# Altium PCB PCB.PcbDoc
Units mm, origin at the board's own origin, x right, y up, seen from the top; angles counter-clockwise.
Board outline 194.82 x 157.1 mm, 2 copper layers (Top Layer, Bottom Layer); 36 components, 25 nets, 102 pads, 15 vias.
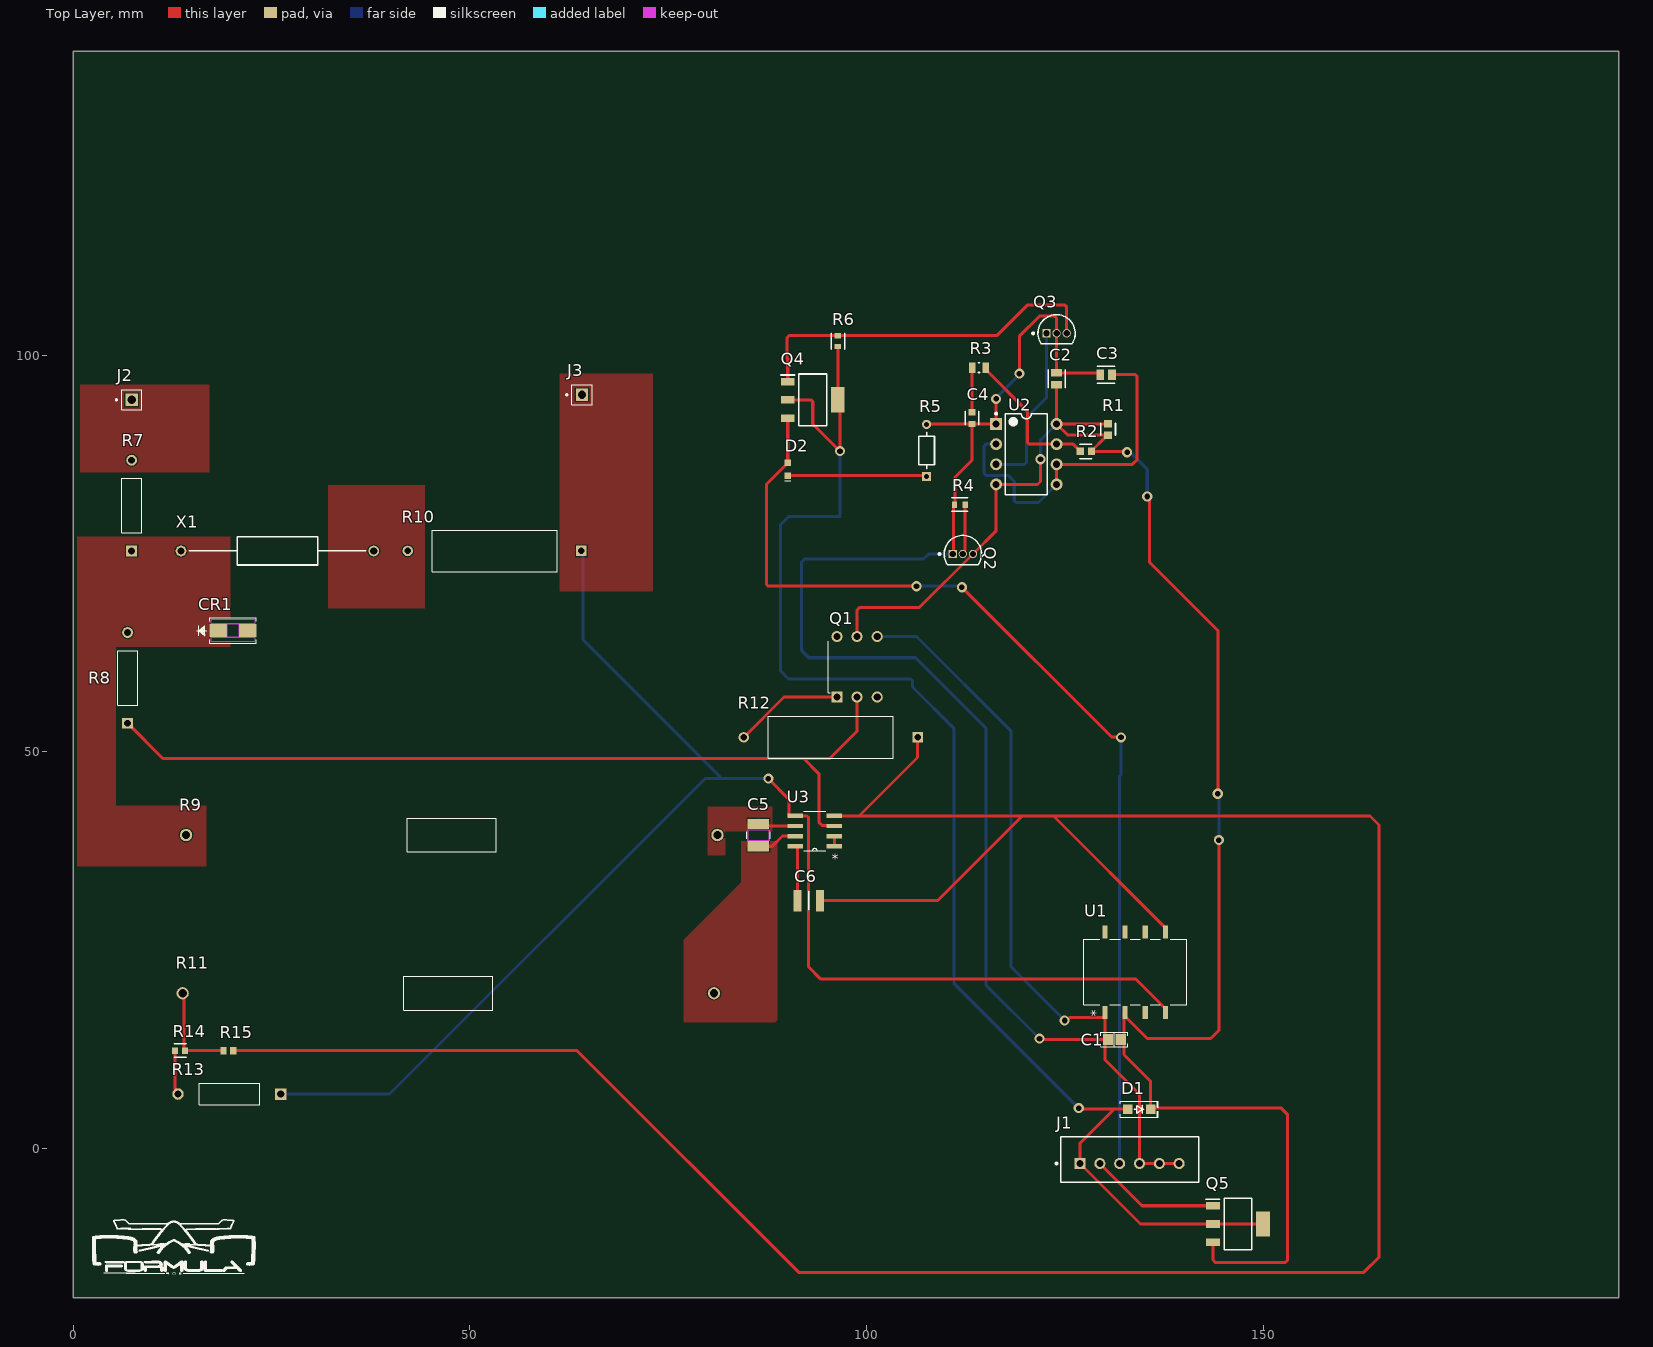
[diagram p0: Top Layer view]
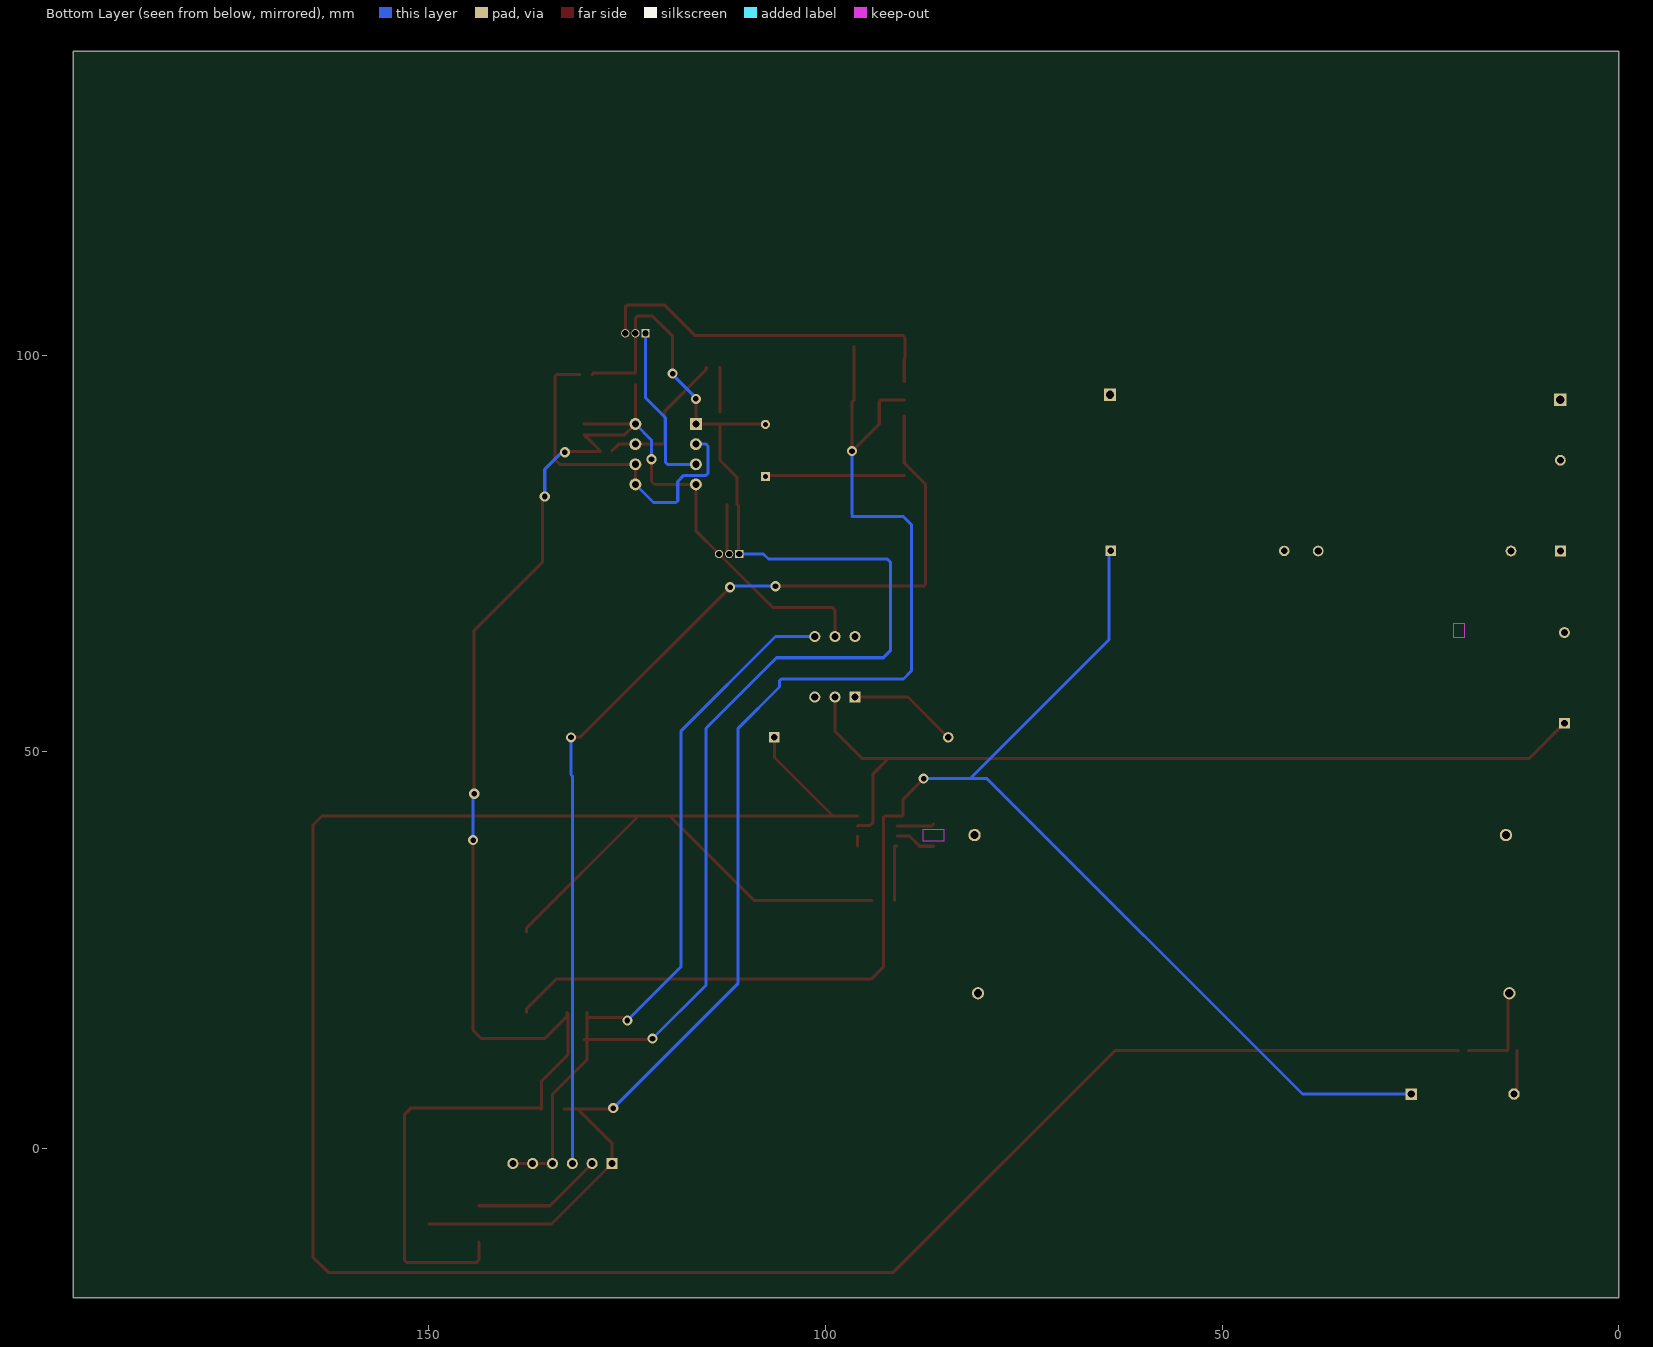
[diagram p1: Bottom Layer view, seen from below]
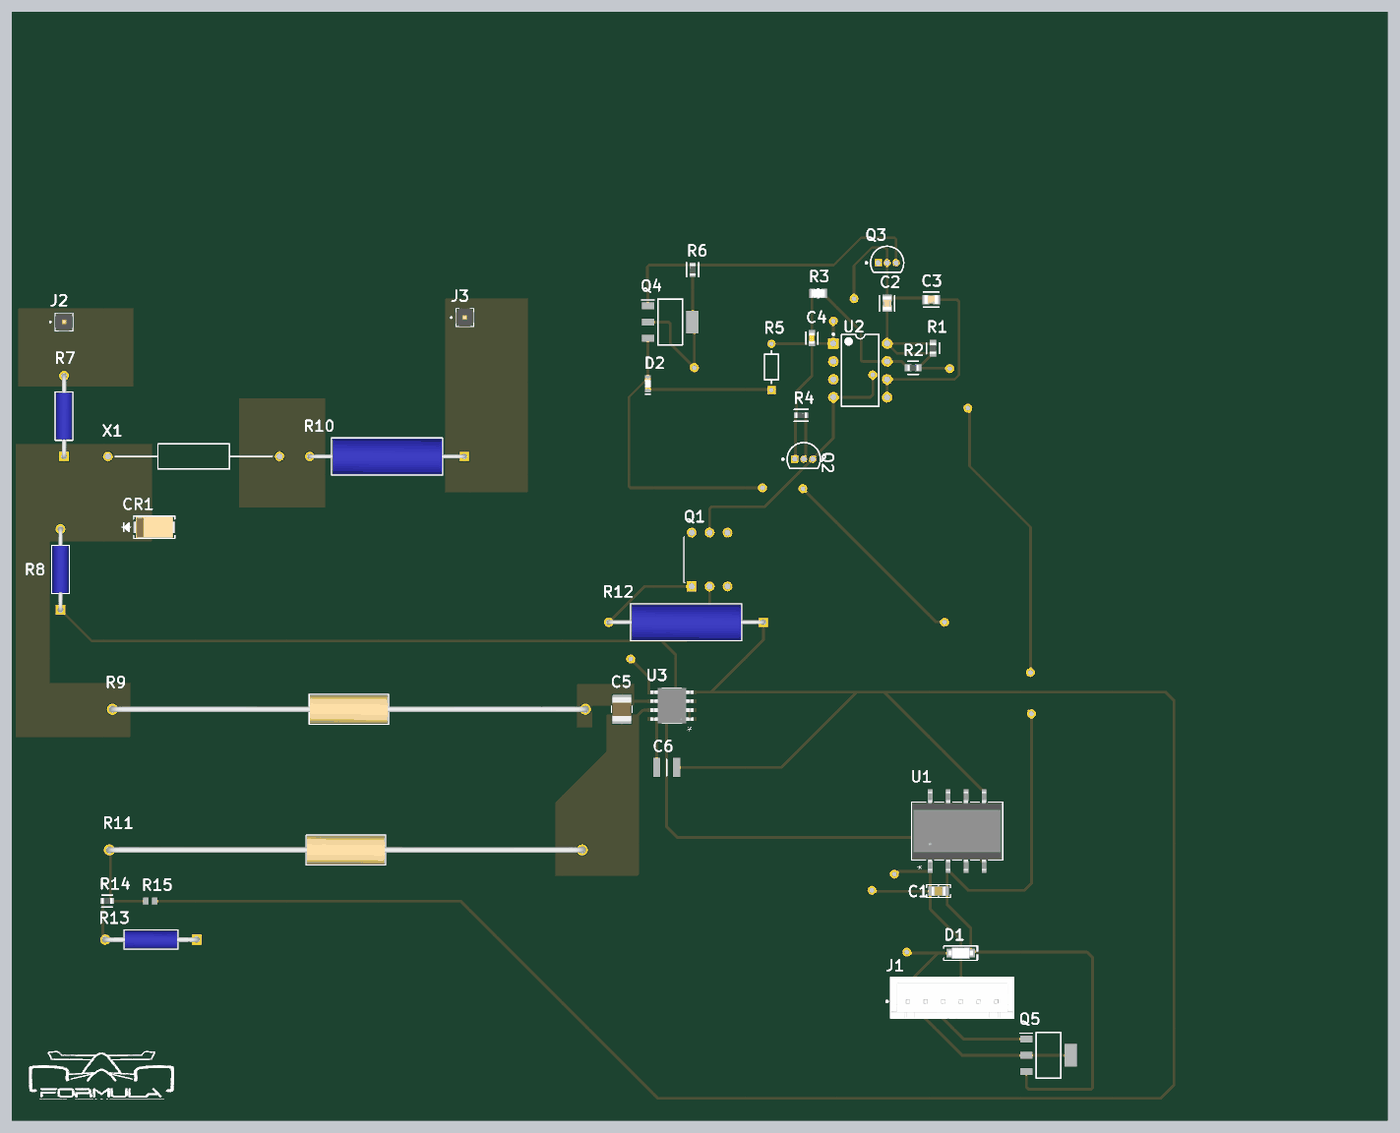
[diagram p2: 3D render of the assembled board from above, using the file's embedded part models]

## Layer stack, top to bottom
Top Solder: solder mask 0.0102, Solder Resist, Dk 3.5
Top Layer: signal copper 0.0356
Dielectric 1: dielectric 0.32, FR-4, Dk 4.8
Bottom Layer: signal copper 0.0356
Bottom Solder: solder mask 0.0102, Solder Resist, Dk 3.5

## Board outline
0,-18.796 194.818,-18.796 194.818,138.303 0,138.303

## Design rules (kind name [scope] priority, off if disabled: settings)
BoardOutlineClearance [All] p1: gap=0.2 ignorepadtopadclearanceinfootprint=FALSE
Clearance [All] p1: gap=0.127 ignorepadtopadclearanceinfootprint=FALSE except(0.25: Arc-Hole Track-Hole SMDPad-Hole THPad-Hole Via-Hole Fill-Hole Poly-Hole Region-Hole Text-Hole)
ComponentClearance [All] p1: gap=0.127 collisioncheckmode=3 verticalgap=0.127 showdistances=TRUE
DiffPairsRouting [All] p1: maxlimit=0.254 minlimit=0.127 mostfreqgap=0.127 toplayer_minwidth=0.127 toplayer_maxwidth=25.4 toplayer_prefwidth=0.127 bottomlayer_minwidth=0.127 bottomlayer_maxwidth=25.4 bottomlayer_prefwidth=0.127 maxuncoupledlength=12.7
Height [All] p1: minheight=0 maxheight=1816.048 prefheight=12.7
HoleSize [All] p1: absolutevalues=TRUE maxlimit=6.3 minlimit=0.3 maxpercent=80.000 minpercent=20.000
HoleToHoleClearance [All] p1: gap=0.25 allowstackedmicrovias=FALSE
MinimumAnnularRing [All] p1: minimumring=0.076
MinimumSolderMaskSliver [All] p1: minsoldermaskwidth=0
PlaneClearance [All] p1: clearance=0.127
PlaneConnect PlaneConnectPowerPads [InPadClass('PowerPads')] p1: planeconnectstyle=Direct reliefexpansion=0.508 reliefentries=4 reliefconductorwidth=0.254 reliefairgap=0.254
PlaneConnect [All] p2: pad.planeconnectstyle=Relief pad.reliefexpansion=0.3 pad.reliefentries=4 pad.reliefconductorwidth=0.127 pad.reliefairgap=0.127 via.planeconnectstyle=Direct via.reliefexpansion=0.3 via.reliefentries=4 via.reliefconductorwidth=0.127 via.reliefairgap=0.127
PolygonConnect PolygonConnectPowerPads [All vs (InPadClass('PowerPads'))] p1: connectstyle=Direct reliefconductorwidth=0.254 reliefentries=4 polygonreliefangle="90 Angle" airgapwidth=0.254
PolygonConnect [All] p2: thpad.connectstyle=Relief thpad.reliefconductorwidth=0.127 thpad.reliefentries=4 thpad.polygonreliefangle="90 Angle" thpad.airgapwidth=0.127 smdpad.connectstyle=Relief smdpad.reliefconductorwidth=0.127 smdpad.reliefentries=4 smdpad.polygonreliefangle="90 Angle" smdpad.airgapwidth=0.127 via.connectstyle=Direct via.reliefconductorwidth=0.127 via.reliefentries=4 via.polygonreliefangle="90 Angle" via.airgapwidth=0.127
RoutingVias [All] p1: holewidth=0.3 width=0.6 viastyle="Through Hole" minholewidth=0.3 minwidth=0.6 maxholewidth=0.6 maxwidth=6.6
SilkToSilkClearance [All] p1: silktosilkclearance=0
SilkToSolderMaskClearance [IsPad] p1: minsilkscreentomaskgap=0.127 clearancetoexposedcopper=TRUE
SolderMaskExpansion [All] p1: expansion=0.075 istentingtop=FALSE
Width [All] p1: maxlimit=25.4 minlimit=0.127 preferedwidth=0.127 minimp=50.000000 maximp=50.000000 favimp=50.000000
20 further rules are at their usual default settings.

## Classes and differential pairs
component class TOP: Q1
component class POWER: C1 D1 J1 U1
component class "LOW VOLTAGE": C2 C3 C4 D2 K1 K2 Q2 Q3 Q4 Q5 R1 R2 R3 R4 R5 R6 U2
component class "HIGH VOLTAGE": C5 C6 CR1 J2 J3 R7 R8 R9 R10 R11 R12 R13 R14 R15 U3 X1

## Components (designator, comment, footprint, x,y, rotation, side; value= is the part's Value field where it differs from the comment)
C1 "1 µF" "CAP 0805_2012" 131.229,13.716 r180 top
C2 "C0805C104K1RAC7210" FP-C0805C-DN-MFG 123.952,97.016 r90 top value="0.10 μF"
C3 "C0805C104K1RAC7210" FP-C0805C-DN-MFG 130.187,97.536 r180 top value="0.10 μF"
C4 "CC0603KRX7R7BB105" FP-CC0603-DA-MFG 113.284,92.063 r270 top value="1 uF"
C5 "C1210C103JCGACAUTO" CAPC340270_140N_KEM 86.36,39.491 r90 top
C6 "C1210W104KCRACAUTO" CAPC3225X230N 92.713,31.242 r180 top
CR1 "SMAZ12-13-F" SMA_DIO 20.145,65.278 r0 top
D1 "1N4007FLTR" SOD123F 134.366,4.953 r0 top
D2 "150060RS75000" WL-SMCW_0603_150060xx75000 90.068,85.611 r90 top
J1 "B6B-XH-A(LF)(SN)" FP-B6B-XH-A_LF_SN-MFG 133.156,-1.38 r0 top
J2 "861400011YO2LF" AMPHENOL_861400011YO2LF 7.366,94.361 r0 top
J3 "861400011YO2LF" AMPHENOL_861400011YO2LF 64.135,94.996 r0 top
Q1 "DIP-OPTOISO-3.55KV-TRANS-W/BASE-6DIP(4N35)" DIP6-2.54-7.3X6.5MM 98.806,60.706 r0 top
Q2 "2N7000" ONSC-TO-92-3-29-11 112.141,74.93 r0 top
Q3 "2N7000" ONSC-TO-92-3-29-11 123.952,102.743 r0 top
Q4 "MCT06P10-TP" SOT230P700X180-4N 93.218,94.361 r0 top
Q5 "MCT06P10-TP" SOT230P700X180-4N 146.812,-9.525 r0 top
R1 "CRCW060322K0FKEA" FP-CRCW0603-e3-IPC_B 130.429,90.631 r90 top
R2 "CRCW060322K0FKEA" FP-CRCW0603-e3-IPC_B 127.635,87.884 r0 top
R3 "CRCW0805220KFKEA" FP-CRCW0805-e3-IPC_C 114.173,98.425 r180 top
R4 "RC0603FR-0710KL" FP-RC0603-0_55-IPC_C 111.76,81.153 r0 top
R5 "CF18JT2K20" FP-CF18-MFG 107.569,87.989 r90 top value=2.2kΩ
R6 "RC0603FR-0710KL" FP-RC0603-0_55-IPC_C 96.393,101.769 r90 top
R7 "MOX200001004FE" RES_MOX-200_OHM 7.366,75.311 r90 top
R8 "MOX200001004FE" RES_MOX-200_OHM 6.858,53.594 r90 top
R9 "ASRM1JA100R" RES_ASRM1_STP 81.204,39.497 r180 top
R10 "FMP300FRF73-2K2" RES_FMP300_15P5X5_YAG 64.064,75.311 r180 top
R11 "ASRM1JA100R" RES_ASRM1_STP 80.772,19.558 r180 top
R12 "FMP300FRF73-2K2" RES_FMP300_15P5X5_YAG 106.426,51.816 r180 top
R13 "CMF55900R00FKR670" RES_CMF07_VIS 26.162,6.858 r180 top
R14 "CRCW060324K0FKEA" FP-CRCW0603-e3-IPC_C 13.462,12.319 r0 top
R15 "CRCW060375K0FKEA" RESC1609X50X30NL10T20 19.568,12.319 r0 top
U1 "TSM 1212S" TSM_SINGLE_TRP 133.858,22.225 r90 top
U2 "NE555P" P0008A 120.142,87.503 r0 top
U3 "LM311DR" D8 93.472,40.005 r180 top
X1 "CCF6049K9FKE36" RESAD2428W69L1016D353 37.889,75.311 r180 top

## Footprints (in the part's own frame and the unit in brackets; to place one, negate y for a bottom-side part, rotate by r counter-clockwise, add the part's x,y. Pads: shape width x height; smd on the part's side, far side on the other; paste and mask are expansions set on the pad)
AMPHENOL_861400011YO2LF [mm]
  rect 1.56x1.56 hole 1.04: 01(0,0)
  silkscreen extent -2.02,-1.27 1.27,1.27, body extent -1.27,-1.27 1.27,1.27, height 9.6
"CAP 0805_2012" [mm] "Chip Capacitor, 2-Leads, Body 2.00x1.20mm, IPC Medium Density"
  rect 1.3x1.4 smd: 1(-0.8,0) 2(0.8,0)
  silkscreen extent -1.7,-0.9 1.7,0.9, body extent -1,-0.64 1,0.64, height 1.26
CAPC3225X230N [mm]
  rect 1.02x2.72 smd: 1(-1.4,0) 2(1.4,0)
  silkscreen extent 0,-1.15 0,1.15
CAPC340270_140N_KEM [mm]
  rect 1.306x2.7 smd paste+0 mask+0: 1(-1.403,0) 2(1.403,0)
  Top Layer keep-out region: -0.699,-1.299 -0.699,1.299 0.699,1.299 0.699,-1.299
  Keep-Out Layer region: -0.699,-1.35 -0.699,1.35 0.699,1.35 0.699,-1.35
  silkscreen extent -0.44,-1.48 0.44,1.48, body extent -1.7,-1.35 1.7,1.35, height 1.4
D8 [mil]
  rect 78x22 smd paste-39 mask-39: 1(-97,75) 2(-97,25) 3(-97,-25) 4(-97,-75) 5(97,-75) 6(97,-25) 7(97,25) 8(97,75)
  silkscreen extent -54,-98 54,98, body extent -122,-99 122,99, height 69
DIP6-2.54-7.3X6.5MM [mm]
  rect 1.4x1.4 hole 0.9: 1(-2.54,-3.81)
  round 1.4 hole 0.9: 2(0,-3.81) 3(2.54,-3.81) 4(2.54,3.81) 5(0,3.81) 6(-2.54,3.81)
  silkscreen extent -3.65,-3.25 -3.4,3.25
FP-B6B-XH-A_LF_SN-MFG [mm]
  rect 1.4x1.4 hole 0.9 paste-1000 mask+0: 1(-6.25,-0.525)
  round 1.4 hole 0.9 paste-1000 mask+0: 2(-3.75,-0.525) 3(-1.25,-0.525) 4(1.25,-0.525) 5(3.75,-0.525) 6(6.25,-0.525)
  silkscreen extent -9.35,-2.88 8.7,2.88, body extent -8.8,-2.98 8.8,2.98, height 0.25
FP-C0805C-DN-MFG [mm]
  rect 0.95x1.35 smd paste+0 mask+0: 1(-0.75,0) 2(0.75,0)
  silkscreen extent -1.1,-1.07 1.1,1.07, body extent -1.4,-0.85 1.4,0.85, height 0.25
FP-CC0603-DA-MFG [mm]
  rect 0.8x0.9 smd paste+0 mask+0: 1(-0.75,0) 2(0.75,0)
  silkscreen extent -0.85,-0.85 0.85,0.85, body extent -1.35,-0.75 1.35,0.75, height 0.25
FP-CF18-MFG [mm]
  rect 1.15x1.15 hole 0.65 paste-1000 mask+0: 1(-3.28,0)
  round 1.15 hole 0.65 paste-1000 mask+0: 2(3.28,0)
  silkscreen extent -2.3,-1 2.3,1
FP-CRCW0603-e3-IPC_B [mm]
  rect 0.935x0.962 smd paste+0 mask+0: 1(-0.715,0) 2(0.715,0)
  silkscreen extent -0.75,-0.95 0.75,0.9, body extent -1.43,-0.73 1.43,0.73, height 0.25
FP-CRCW0603-e3-IPC_C [mm]
  rect 0.735x0.862 smd paste+0 mask+0: 1(-0.615,0) 2(0.615,0)
  silkscreen extent -0.75,-0.85 0.75,0.85, body extent -1.08,-0.58 1.08,0.58, height 0.25
FP-CRCW0805-e3-IPC_C [mil]
  rect 31.75x51.5 smd paste+0 mask+0: 1(-33.5,0) 2(33.5,0)
  silkscreen extent -3,-25 3,25, body extent -53,-31 53,31, height 10
FP-RC0603-0_55-IPC_C [mm]
  rect 0.659x0.812 smd paste+0 mask+0: 1(-0.677,0) 2(0.677,0)
  silkscreen extent -1.01,-0.85 1.01,0.85, body extent -1.11,-0.55 1.11,0.55, height 0.25
ONSC-TO-92-3-29-11 [mm] "TO, 3-Leads, Body Dia 4.7mm, Pitch 1.27mm"
  rect 1.05x1.05 hole 0.8: 1(-1.27,0)
  round 1.05 hole 0.8: 2(0,0) 3(1.27,0)
  silkscreen extent -3.07,-1.34 2.35,2.35, body extent -2.35,-1.33 2.36,2.36, height 7.87
P0008A [mm] "DIP, 8-Leads, Body 10.15x6.6mm, Pitch 2.54mm"
  rect 1.5x1.5 hole 0.9: 1(-3.81,3.81)
  round 1.5 hole 0.9: 2(-3.81,1.27) 3(-3.81,-1.27) 4(-3.81,-3.81) 5(3.81,-3.81) 6(3.81,-1.27) 7(3.81,1.27) 8(3.81,3.81)
  silkscreen extent -3.93,-5.1 2.65,5.23, body extent -3.95,-5.07 3.95,5.07, height 5.08
RES_ASRM1_STP [mil]
  round 61 / inner round 60 / far side round 61 hole 41 paste-30.5 mask+0: 1(0,0) 2(2637,0)
  silkscreen extent 1097,-83 1540,84, body extent -16,-78 2653,78, height 157
RES_CMF07_VIS [mil]
  rect 57x57 / inner round 60 / far side rect 57x57 hole 37 paste-28.5 mask+0: 1(0,0)
  round 57 / inner round 60 / far side round 57 hole 37 paste-28.5 mask+0: 2(510,0)
  silkscreen extent 105,-54 405,54, body extent -14,-49 524,49, height 98
RES_FMP300_15P5X5_YAG [mil]
  rect 52x52 / inner round 60 / far side rect 52x52 hole 32 paste-26 mask+0: 1(0,0)
  round 52 / inner round 60 / far side round 52 hole 32 paste-26 mask+0: 2(862.2,0)
  silkscreen extent 121,-103 741,104, body extent -11,-98 873,99, height 197
RES_MOX-200_OHM [mil]
  rect 54x54 / inner round 60 / far side rect 54x54 hole 34 paste-27 mask+0: 1(0,0)
  round 54 / inner round 60 / far side round 54 hole 34 paste-27 mask+0: 2(450,0)
  silkscreen extent 90,-50 360,50, body extent -12,-45 462,45, height 90
RESAD2428W69L1016D353 [mm]
  round 1.35 hole 0.9: 1(0,0) 2(24.3,0)
  silkscreen extent 1.02,-1.77 23.28,1.77
RESC1609X50X30NL10T20 [mm] "Chip Resistor, 2-Leads, Body 1.55x0.85mm, IPC Medium Density"
  rect 0.8x0.95 smd: 1(-0.625,0) 2(0.625,0)
  body extent -0.82,-0.48 0.82,0.48, height 0.5
SMA_DIO [mm]
  rect 2.18x1.63 smd paste+0 mask+0: 1(-1.857,0) 2(1.857,0)
  Top Layer keep-out region: -2.744,-1.409 -2.744,-0.866 2.744,-0.866 2.744,-1.409
  Top Layer keep-out region: -2.744,0.866 -2.744,1.409 2.744,1.409 2.744,0.866
  Top Layer keep-out region: -0.716,-0.866 -0.716,0.866 0.716,0.866 0.716,-0.866
  Keep-Out Layer region: -0.716,-0.866 -0.716,0.866 0.716,0.866 0.716,-0.866
  silkscreen extent -4.57,-1.59 2.92,1.59, body extent -2.8,-1.46 2.8,1.46, height 2.35
SOD123F [mm] "SODFL, 2-Leads, Body 1.60x3.50mm, IPC Medium Density"
  rect 1.2x1.2 smd: 1(-1.43,0) 2(1.43,0)
  silkscreen extent -2.41,-1.02 2.41,1.02, body extent -1.75,-0.8 1.75,0.8, height 1.1
SOT230P700X180-4N [mm]
  rect 1.75x0.95 smd: 1(-3.15,2.3) 2(-3.15,0) 3(-3.15,-2.3)
  rect 1.75x3.2 smd: 4(3.15,0)
  silkscreen extent -4.03,-3.25 1.75,3.25
TSM_SINGLE_TRP [mil]
  rect 65x26 smd paste+0 mask+0: 1(-200,150) 2(-200,50) 3(-200,-50) 4(-200,-150) 5(200,-150) 6(200,-50) 7(200,50) 8(200,150)
  silkscreen extent -163,-255 163,255, body extent -219,-250 219,250, height 278
WL-SMCW_0603_150060xx75000 [mm] "SMD Mono-color Chip LED, body 1.6x0.8mm"
  rect 0.8x0.8 smd: 1(-0.8,0) 2(0.8,0)
  silkscreen extent -1.55,-0.4 -1.4,0.4, body extent -0.8,-0.4 0.8,0.4, height 0.7

## Part data
C1: library part GCJ21BR71H105KA01L, "CAP CER 1UF 50V X7R 0805", Device Package="0805 (2012 Metric)", Manufacturer="Murata Electronics", Operating Temperature="-55°C ~ 125°C", Ratings=AEC-Q200, Supplier Part Number 1=490-10667-1-ND, Temperature Coefficient=X7R, Tolerance=±10%, Voltage - Rated=50V, Applications="Automotive, Boardflex Sensitive", Capacitance="1 µF", ComponentLink1Description=Datasheet, ComponentLink1URL=https://www.murata.com/~/media/webrenewal/support/library/catalog/products/capacitor/mlcc/c03e.ashx?la=en-us, ComponentLink2Description="DigiKey Link", ComponentLink2URL=https://www.digikey.com/en/products/detail/murata-electronics/GCJ21BR71H105KA01L/4903512, Features="Soft Termination", LastUpdated="2023-12-23 8:15:46 PM", Lifecycle Status=Active, Minimum Order=1, Mounting Type="Surface Mount, MLCC", Package / Case="0805 (2012 Metric)", Packaging=TapeAndReel, Part Number=GCJ21BR71H105KA01L, Part Status=Active, partid=2709, Price=0.05, Series=GCJ, Size / Dimension="0.079\" L x 0.049\" W (2.00mm x 1.25mm)", Supplier 1=DigiKey, Thickness (Max)="0.057\" (1.45mm)"
C2 C3: library part CMP-03020-008988-2, "C0805 0.10 μF X7R 30ppm/°C 10.00% 100 V", Capacitance="0.10 μF", Manufacturer=KEMET, Package=C0805C-DN, Temperature="-55°C to +125°C", Temperature Characteristic=X7R, Temperature Coefficient=30ppm/°C, Temperature Range High=+125°C, Temperature Range Low=-55°C, Tolerance=0.1, Voltage Rating="100 V", Automotive=No, Category=Cap, ComponentLink2Description=Datasheet, ComponentLink2URL=https://content.kemet.com/datasheets/KEM_C1003_C0G_SMD.pdf, Device Class L1="Passive Components", Device Class L2=Capacitors, Device Class L3="Ceramic Capacitors", Height=0.88mm, Ipc Land Pattern Name=CAPC200125X78, Lead Free=Yes, Manufacturer Part Number=C0805C104K1RAC7210, Material=Ceramic, Octopart=https://octopart.com/c0805c104k1rac7210-kemet-24791099, RoHS=TRUE
C4: library part CMP-03422-000924-1, "CAP CER 1UF 16V X7R 0603", Capacitance="1 uF", Manufacturer=YAGEO, Package=CC0603-DA, Temperature="-55°C to +125°C", Temperature Characteristic=X7R, Temperature Coefficient=15%, Temperature Range High=+125°C, Temperature Range Low=-55°C, Tolerance=0.1, Voltage="16 V", Automotive=No, Category=Cap, ComponentLink2Description=Datasheet, ComponentLink2URL=http://www.yageo.com/documents/recent/UPY-GPHC_X7R_6.3V-to-50V_18.pdf, Device Class L1="Passive Components", Device Class L2=Capacitors, Device Class L3="Ceramic Capacitors", Digikey Description="CAP CER 1UF 16V X7R 0603", Footprint Url=http://www.yageo.com/exep/pages/download/literatures/UPY-C_GEN_24.pdf, Height=0.9mm, Lead Free=Yes, Manufacturer Part Number=CC0603KRX7R7BB105, Material=Ceramic, Mouser Description="Multilayer Ceramic Capacitor, CC Series, 1 - F, - 10%, X7R, 16 V, 0603 [1608 Metric]", Octopart=https://octopart.com/cc0603krx7r7bb105-yageo-42271928, RoHS=TRUE, Voltage Rating="16 V"
C5: "No Description Available", Mfr_Name=Kemet, Copyright="Copyright (C) 2024 Ultra Librarian. All rights reserved.", Manufacturer_Part_Number=C1210C103JCGACAUTO, RefDes=RefDes, Type=DEV
C6: "ArcShield SMD Auto X7R HV, Ceramic, 0.1 uF, 10%, 500 VDC, 750 VDC, 125C, -55C, X7R, SMD, MLCC, ArcShield, High Voltage, Automotive Grade, 2.5 % , 1 GOhms, 105 mg, 1210, 3.3mm, 2.6mm, 2.1mm, 0.6mm, 2000, 78  Weeks, 80", Manufacturer_Name=KEMET, Mouser Part Number=80-C1210W104KCRAUTO, Datasheet Link=https://content.kemet.com/datasheets/KEM_C1034_X7R_HV_ARC_SMD.pdf, Geometry.Height=2.3mm, Manufacturer_Part_Number=C1210W104KCRACAUTO, Mouser Price/Stock=https://www.mouser.co.uk/ProductDetail/KEMET/C1210W104KCRACAUTO?qs=dO8Bi0p7p7Q4YyAQZJXbEw%3D%3D
CR1: "No Description Available", Mfr_Name="Diodes Inc", Copyright="Copyright (C) 2024 Ultra Librarian. All rights reserved.", Manufacturer_Part_Number=SMAZ12-13-F, RefDes=RefDes, Type=DEV
D1: "STANDARD RECTIFIER 1000V SOD-123", Capacitance @ Vr, F="15pF @ 4V, 1MHz", Current - Average Rectified (Io)=1A, Current - Reverse Leakage @ Vr="5µA @ 1000V", Manufacturer="SMC Diode Solutions", Package / Case=SOD-123F, Supplier Device Package=SOD-123FL, Supplier Part Number 1=1655-1N4007FLCT-ND, Voltage - DC Reverse (Vr) (Max)=1000V, Voltage - Forward (Vf) (Max) @ If="1.1V @ 1A", ComponentLink1Description=Datasheet, ComponentLink1URL=http://www.smc-diodes.com/propdf/1N4001FL-1N4007FL%20N1646%20REV.A.pdf, ComponentLink2Description="DigiKey Link", ComponentLink2URL=http://digikey.com/product-detail/en/smc-diode-solutions/1N4007FLTR/1655-1N4007FLCT-ND/11657827, Diode Type=Standard, LastUpdated="2020-08-30 8:59:55 PM", Lifecycle Status=Active, Minimum Order=1, Mounting Type="Surface Mount", Packaging=TapeAndReel, Part Number=1N4007FLTR, partid=3314, Price=0.01, Speed="Standard Recovery >500ns, > 200mA (Io)", Supplier 1=DigiKey
D2: library part CMP-1426-00001-3, Case Code (Imperial)=0603, Case Code (Metric)=1608, Color=Red, Forward Current=100mA, Forward Voltage=2V, Max Junction Temperature (Tj)=95°C, Max Operating Temperature=85°C, Max Reverse Voltage (DC)=5V, Min Operating Temperature=-40°C, Power Dissipation=72mW, Test Current=20mA, Case/Package=0603, Dominant Wavelength=625nm, Height=700µm, Length=1.6mm, Lens Style="Clear, Rectangular", Luminous Intensity=250mcd, Mount="Surface Mount", NexarPartId=29717776, Packaging="Tape and Reel", Peak Wavelength=630nm, REACH SVHC=Unknown, Reverse Voltage=5V, RoHS=Compliant, Viewing Angle=140°, Wavelength=625nm, Width=800µm
J1: library part CMP-17439-000076-1, "CONN HEADER VERT 6POS 2.5MM"
J2 J3: "Board to Board connector, Unshrouded Header, Through Hole, Single Row, 1 Position, Vertical.", Package=None, Check_prices=https://www.snapeda.com/parts/861400011YO2LF/Amphenol/view-part/?ref=eda, Digi-Key_Part_Number=609-861400011YO2LF-ND, MF="AMPHENOL ICC / FCI", MP=861400011YO2LF, Purchase-URL=https://pricing.snapeda.com/search/part/861400011YO2LF/?ref=eda, SnapEDA_Link=https://www.snapeda.com/parts/861400011YO2LF/Amphenol/view-part/?ref=snap
Q1: "Optoisolator Transistor with Base Output 5000Vrms 1 Channel 6-DIP", Package="DIP-6 Texas Instruments", Availability=Good, Check_prices=https://www.snapeda.com/parts/4N35/Vishay%20Semiconductor%20Opto%20Division/view-part/579099/?ref=eda, MF=Vishay, MP=4N35, Price=None, Purchase-URL=https://pricing.snapeda.com/search/part/4N35/?ref=eda, SnapEDA_Link=https://www.snapeda.com/parts/4N35/Vishay%20Semiconductor%20Opto%20Division/view-part/579099/?ref=snap
Q2 Q3: library part CMP-1058-00936-1, "Small Signal MOSFET, 200 mA, 60 V, N-Channel, 3-Pin TO-92, Bulk Box", Manufacturer="On Semiconductor", Package Type=TO-92, Channel Polarity="N Channel", Ciss Typ (pF)=60, ComponentLink1Description="Manufacturer URL", ComponentLink1URL=http://www.onsemi.com/, ComponentLink2Description=Datasheet, ComponentLink2URL=http://www.onsemi.com/pub_link/Collateral/2N7000-D.PDF, ComponentLink3Description="Package Specification", ComponentLink3URL=http://www.onsemi.cn/pub_link/Collateral/2N6426-D.PDF, Configuration=Single, Coss Typ (pF)=25, Crss Typ (pF)=5, DatasheetVersion="Rev. 8", ID Max (A)=0.2, Mounting Technology="Through Hole", PackageDescription="3-Pin Transistor Outline, Body 4.825 x 3.685 mm, Pitch 1.27 mm", PackageReference=TO-92-3-29-11_AM_SL, PackageVersion="Rev. AM", Packing="Bulk Box", PartNumber=2N7000, PD Max (W)=0.35, V(BR)DSS Min (V)=60, VGS Max (V)=20, VGS(th) Max (V)=3
Q4 Q5: "P-CHANNEL MOSFET", Manufacturer_Name=MCC, Mouser Part Number=833-MCT06P10-TP, Arrow Part Number=MCT06P10-TP, Arrow Price/Stock=https://www.arrow.com/en/products/mct06p10-tp/micro-commercial-components, Datasheet Link=https://www.mccsemi.com/pdf/Products/MCT06P10(SOT-223).pdf, Geometry.Height=1.8mm, Manufacturer_Part_Number=MCT06P10-TP, Mouser Price/Stock=https://www.mouser.co.uk/ProductDetail/Micro-Commercial-Components-MCC/MCT06P10-TP?qs=u16ybLDytRb58JP1wVwnug%3D%3D
R1 R2: library part CMP-2000-03092-2, "RES Thick Film, 22kΩ, 1%, 0.1W, 100ppm/°C, 0603", Case Code (Imperial)=0603, Case Code (Metric)=1608, Max Operating Temperature=155°C, Max Power Dissipation=100mW, Min Operating Temperature=-55°C, Package Quantity=10, Resistance=22kR, Temperature Coefficient=100ppm/°C, Tolerance=1%, Voltage Rating=75V, Case/Package=0603, Composition="Thick Film", Contact Plating=Tin, Depth=0.85mm, Features="Automotive AEC-Q200", Height=0.45mm, Lead Free="Lead Free", Length=1.55mm, Military Standard=Not, Mount="Surface Mount", Number of Terminations=2, Packaging="Tape and Reel", Power Rating=100mW, Radiation Hardening=No, Termination=SMD/SMT, Voltage Rating (DC)=75V, Weight=7.1E-05oz, Width=0.85mm
R3: library part CMP-1013-00772-3, "RES Thick Film, 220kΩ, 1%, 0.125W, 100ppm/°C, 0805", Case Code (Imperial)=0805, Case Code (Metric)=2012, Max Operating Temperature=155°C, Max Power Dissipation=125mW, Min Operating Temperature=-55°C, Package Quantity=10, Resistance=220kR, Temperature Coefficient=100ppm/°C, Tolerance=1%, Voltage Rating=150V, Case/Package=0805, Composition="Thick Film", Contact Plating=Tin, Depth=1.25mm, Features="Automotive AEC-Q200", Height=0.45mm, Lead Free="Lead Free", Length=2mm, Military Standard=Not, Number of Terminations=2, Packaging="Tape and Reel", Power Rating=125mW, Radiation Hardening=No, Termination=SMD/SMT, Voltage Rating (DC)=150V, Weight=0.000194oz, Width=1.25mm
R4 R6: library part CMP-2100-03664-2, "RES 10K OHM 1% 1/10W 0603", Case Code (Imperial)=0603, Case Code (Metric)=1608, Max Operating Temperature=155°C, Max Power Dissipation=100mW, Min Operating Temperature=-55°C, Resistance=10kR, Resistance Tolerance=1%, Resistor Type="Thick Film", Temperature Coefficient=100ppm/°C, Voltage Rating=75V, Voltage Rating (DC)=50V, Case/Package=0603, Construction=Rectangular, Depth=0.8mm, Features="Moisture Resistant", Height=0.45mm, Lead Free="Lead Free", Lead Pitch=0.3mm, Length=1.6mm, Military Standard=Not, Number of Pins=2, Number of Terminations=2, Packaging="Tape and Reel", Power Rating=100mW, RoHS Compliant=Yes, Series=RC, Size Code=0603, Termination=SMD/SMT, Tolerance=1%, Weight=7.1E-05oz, Width=0.8mm
R5: library part CMP-26528-000001-1, "RES 2.2K OHM 1/8W 5% CF AXIAL", Manufacturer="Stackpole Electronics Inc", Package=CF18, Power Rating=0.125W, Resistance=2.2kΩ, Temperature="-55°C to +155°C", Temperature Coefficient=0/-400ppm/°C, Temperature Range High=+155°C, Temperature Range Low=-55°C, Tolerance=5%, Voltage Rating=250V, Automotive=No, Category=Res, ComponentLink2Description=Datasheet, ComponentLink2URL=https://www.seielect.com/catalog/sei-cf_cfm.pdf, Composition="Carbon Film", Device Class L1="Passive Components", Device Class L2=Resistors, Device Class L3="Through-Hole Resistors", Digikey Description="RES 2.2K OHM 1/8W 5% CF AXIAL", Height=2mm, Ipc Land Pattern Name=RESAD656W65L360D200, Lead Free=Yes, Manufacturer Part Number=CF18JT2K20, Octopart=https://octopart.com/cf18jt2k20-stackpole+electronics-19205714, RoHS=TRUE, Series=CF
R7 R8: "No Description Available", Mfr_Name=Ohmite, Copyright="Copyright (C) 2024 Ultra Librarian. All rights reserved.", Digi-Key_Part_Number_1=MOX200001004FE-ND, Manufacturer_Part_Number=MOX200001004FE, RefDes=RefDes, Type=DEV
R9 R11: "No Description Available", Mfr_Name="Stackpole International", Copyright="Copyright (C) 2024 Ultra Librarian. All rights reserved.", Manufacturer_Part_Number=ASRM1JA100R, RefDes=RefDes, Type=DEV
R10 R12: "No Description Available", Mfr_Name=Yageo, Copyright="Copyright (C) 2024 Ultra Librarian. All rights reserved.", Manufacturer_Part_Number=FMP300FRF73-2K2, RefDes=RefDes, Type=DEV
R13: "No Description Available", Mfr_Name=Vishay, Copyright="Copyright (C) 2024 Ultra Librarian. All rights reserved.", Manufacturer_Part_Number=CMF55900R00FKR670, RefDes=RefDes, Type=DEV
R14: library part CMP-1012-00664-3, "RES Thick Film, 24kΩ, 1%, 0.1W, 100ppm/°C, 0603", Case Code (Imperial)=0603, Case Code (Metric)=1608, Max Operating Temperature=155°C, Max Power Dissipation=100mW, Min Operating Temperature=-55°C, Package Quantity=10, Resistance=24kR, Temperature Coefficient=100ppm/°C, Tolerance=1%, Voltage Rating=75V, Case/Package=0603, Composition="Thick Film", Contact Plating=Tin, Depth=0.85mm, Features="Automotive AEC-Q200", Height=0.45mm, Lead Free="Lead Free", Length=1.55mm, Military Standard=Not, Mount="Surface Mount", Number of Terminations=2, Packaging="Tape and Reel", Power Rating=100mW, Radiation Hardening=No, Termination=SMD/SMT, Voltage Rating (DC)=75V, Weight=7.1E-05oz, Width=0.033inch, Working Voltage=75V
R15: library part CMP-2000-03571-1, Manufacturer="Vishay Dale", Part Number=CRCW060375K0FKEA
U1: "No Description Available", Mfr_Name="Traco Power", Copyright="Copyright (C) 2024 Ultra Librarian. All rights reserved.", Manufacturer_Part_Number="TSM 1212S", RefDes=RefDes, Type=DEV
U2: library part CMP-2000-04954-1, "Precision Timer, 4.5 to 16 V, 0 to 70 degC, 8-Pin DIP, Pb-Free, Tube", Manufacturer=TexasInstruments, Maximum High Level Output Current=-200mA, Maximum Low Level Output Current=200mA, Operating Supply Voltage=5, Package=8PDIP, Package Description="8-Pin Double In-line Package, Body 9.59 x 6.35 mm, Pitch 2.54 mm", Package Reference=P8, Category=Timer, Datasheet URL=http://www.ti.com/general/docs/lit/getliterature.tsp?genericPartNumber=NE555&fileType=pdf, Datasheet Version="Rev. I, 09/2014", Manufacturer URL=http://www.ti.com/, Number of Internal Timers=1, Package URL=http://www.ti.com/lit/ml/mpdi001b/mpdi001b.pdf, Packaging=Rail/Tube, Rad Hard=No, Type=Standard
U3: "No Description Available", Mfr_Name="Texas Instruments", Copyright="Copyright (C) 2024 Ultra Librarian. All rights reserved.", Manufacturer_Part_Number=LM311DR, RefDes=RefDes, Type=DEV
X1: "Metal Film Resistors - Through Hole 1/2watt 49.9Kohms 1% Rated to 1watt", Manufacturer_Name=Vishay, Arrow Part Number=CCF6049K9FKE36, Arrow Price/Stock=https://www.arrow.com/en/products/ccf6049k9fke36/vishay?region=nac, Datasheet Link=https://www.vishay.com/doc?31068, Manufacturer_Part_Number=CCF6049K9FKE36

## Via types
v1: diameter 1.27, hole 0.711, Top Layer to Bottom Layer, 15 vias

## Nets (pads, with @x,y where several pads share a name; then routed paths per layer and width w, separated by ;. In a path a pad name is that pad's centre, name@x,y a point inside that pad or via, vN(x,y) a via of type N, cw(c..) or ccw(c..) an arc to the next point about the centre after c; other vN are vias at no path point)
12V: C6.1 R12.1 R15.2 U1.5 U3.4 | length 343.7
  Top Layer w0.381: R15.2 63.5,12.319 91.44,-15.621 162.687,-15.621 164.592,-13.716 164.592,40.767 163.449,41.91 123.558,41.91 ; C6.1 108.966,31.242 119.634,41.91 ; U3.4 99.06,41.91 ; R12.1 106.426,49.276 99.06,41.91 ; U1.5 137.668,27.8 123.558,41.91 ; 99.06,41.91 119.634,41.91 ; 119.634,41.91 123.558,41.91
cont: C3.1 U2.2 U2.5 U2.6 | length 44.8
  Top Layer w0.381: U2.5 U2.6 133.508,86.233 134.112,86.837 134.112,97.313 133.889,97.536 C3.1
  Bottom Layer w0.381: U2.2 115.031,88.773 114.808,88.55 114.808,85.09 115.062,84.836 117.856,84.836 118.618,84.074 118.618,81.63 118.841,81.407 121.666,81.407 U2.5
disch: R2.1 R3.1 U2.7 | length 18.7
  Top Layer w0.381: R3.1 115.024,98.174 120.269,92.929 120.269,88.996 120.492,88.773 U2.7 126.044,88.773 126.92,87.898 R2.1
GND: J3.01 R10.1 R13.1 U1.4 U3.5 | length 188.7
  Top Layer w0.381: v1(87.63,46.609) 90.208,44.031 90.208,41.999 90.297,41.91 U3.5 92.487,41.91 92.71,41.687 92.71,22.86 94.234,21.336 133.972,21.336 137.668,17.64 U1.4
  Bottom Layer w0.381: R13.1 39.878,6.858 79.629,46.609 81.788,46.609 ; R10.1 64.262,75.113 64.262,64.135 81.788,46.609 ; v1(87.63,46.609) 81.788,46.609
negativeRegulatorIn: C1.2 C2.2 C3.2 C4.2 J1.4 J1.5 J1.6 Q1.4 Q2.1 Q3.2 R4.1 R5.2 U1.1 U2.1 | length 257.3
  Top Layer w0.381: R5.2 107.591,91.291 113.262,91.291 C4.2 ; Q2.1 110.977,75.036 110.977,81.047 R4.1 111.125,81.195 111.125,84.582 113.284,86.741 C4.2 ; v1@116.205,94.361 116.332,94.234 U2.1 C4.2 ; v1(119.253,97.663) 119.253,102.362 121.793,104.902 123.729,104.902 123.952,104.679 Q3.2 C2.2 129.207,97.766 C3.2 ; v1(121.793,13.843) 121.92,13.716 C1.2@130.048,13.716 ; v1(124.968,16.129) 125.209,16.129 125.59,16.51 129.908,16.51 U1.1@130.048,16.65 ; U1.1 U1.1@130.048,16.65 ; C1.2 C1.2@130.048,13.716 ; J1.6 J1.5 J1.4 134.406,6.818 130.048,11.176 C1.2@130.048,13.716 ; C1.2@130.048,13.716 U1.1@130.048,16.65
  Bottom Layer w0.381: Q1.4 106.299,64.516 118.237,52.578 118.237,22.86 v1(124.968,16.129) ; Q2.1 107.823,74.93 107.188,74.295 92.202,74.295 91.821,73.914 91.821,62.738 92.71,61.849 106.172,61.849 115.062,52.959 115.062,20.574 v1(121.793,13.843) ; v1(116.332,94.488) 116.332,94.615 119.126,97.409 v1@119.253,97.409
NET_+: C5.2 R9.1 U3.6 | length 4.8
  Top Layer w0.381: C5.2 86.614,40.64 U3.6
NET_-: C5.1 R11.1 U3.7 | length 5.2
  Top Layer w0.381: C5.1 88.126,38.088 89.408,39.37 U3.7
NetC4_1: C4.1 R3.2 | length 5.6
  Top Layer w0.381: C4.1 113.303,92.832 113.303,98.406 R3.2
NetC6_2: C6.2 U3.8 | length 7.1
  Top Layer w0.381: U3.8 91.224,38.1 91.313,38.011 C6.2
NetCR1_1: CR1.1 R7.1 R8.2 R9.2 X1.2
NetD1_1: D1.1 J1.1 Q4.2 Q4.4 Q5.2 Q5.4 R6.1 | length 179.2
  Top Layer w0.381: Q4.2 92.995,94.361 93.218,94.138 93.218,91.313 v1(96.647,87.884) 96.647,94.132 Q4.4@96.393,94.386 ; Q4.4 Q4.4@96.393,94.386 ; R6.1 Q4.4@96.393,94.386 ; v1@127,5.207 127.254,4.953 131.191,4.953 ; D1.1 131.191,4.953 ; Q5.4 Q5.2 134.526,-9.525 J1.1 126.906,0.668 131.191,4.953
  Bottom Layer w0.381: v1(96.647,87.884) 96.647,86.233 96.678,86.202 96.678,79.883 ; 96.678,79.629 90.17,79.629 89.154,78.613 89.154,60.198 90.17,59.182 105.568,59.182 105.791,58.959 105.791,58.166 110.998,52.959 110.998,20.828 v1(126.746,5.08)
NetD2_1: D2.1 R5.1 | length 17.5
  Top Layer w0.381: D2.1 107.467,84.811 R5.1
NetD2_2: D2.2 J1.3 Q4.3 | length 128.4
  Top Layer w0.381: Q4.3@90.068,92.315 Q4.3 D2.2 87.376,83.719 87.376,71.089 87.599,70.866 v1@105.918,70.866 ; v1(112.014,70.739) 130.874,51.88 132.017,51.88 v1(132.08,51.816)
  Bottom Layer w0.381: v1(106.299,70.866) 111.887,70.866 v1(112.014,70.739) ; J1.3 131.906,46.943 132.08,47.117 v1(132.08,51.816)
NetJ1_2: J1.2 Q5.1 | length 16.5
  Top Layer w0.381: J1.2 134.726,-7.225 Q5.1
NetJ2_01: J2.01 R7.2
NetQ1_1: Q1.1 R12.2 | length 13.9
  Top Layer w0.381: R12.2 84.582,51.816 84.582,51.872 89.606,56.896 Q1.1
NetQ1_2: Q1.2 R8.1 U3.3 | length 110.5
  Top Layer w0.381: R8.1 11.303,49.149 92.075,49.149 ; U3.3 95.852,40.723 94.374,40.723 93.98,41.117 93.98,47.244 92.075,49.149 ; Q1.2 98.806,52.578 95.377,49.149 92.075,49.149
NetQ2_2: Q2.2 R4.2 | length 6.3
  Top Layer w0.381: Q2.2 112.141,75.111 112.437,75.407 R4.2
NetQ3_3: Q3.3 Q4.1 R6.2 | length 45.9
  Top Layer w0.381: Q4.1 90.068,99.545 89.99,99.623 89.99,102.222 90.214,102.445 R6.2 116.415,102.445 120.269,106.299 124.999,106.299 125.222,106.076 Q3.3
NetR10_2: R10.2 X1.1
NetR11_2: R11.2 R14.2 R15.1 | length 12.2
  Top Layer w0.381: R11.2 13.935,19.415 13.935,12.462 R14.2 R15.1
NetR13_2: R13.2 R14.1 | length 5.6
  Top Layer w0.381: R14.1 12.847,7.508 13.208,7.147 R13.2
NetU3_1: U3.1 U3.2 | length 1.3
  Top Layer w0.381: U3.1 U3.2
out: Q3.1 U2.3 | length 21.2
  Bottom Layer w0.381: U2.3 119.919,86.233 120.142,86.456 120.142,92.075 122.682,94.615 Q3.1
regulatorIn: C1.1 C2.1 D1.2 Q1.5 Q2.3 Q5.3 R1.1 R1.2 R2.2 U1.2 U2.4 U2.8 | length 223.7
  Top Layer w0.381: Q1.5 98.806,67.849 99.156,68.199 106.68,68.199 Q2.3 116.332,77.851 U2.4 121.539,83.693 121.92,84.074 v1(121.92,86.868) ; U2.8@123.946,91.319 U2.8 ; C2.1 U2.8 ; R2.2 R2.2@128.35,87.898 ; R1.2 130.412,91.33 123.969,91.33 U2.8 ; v1(132.842,87.757) 132.779,87.82 128.427,87.82 R2.2@128.35,87.898 ; v1@135.636,81.7 135.636,73.914 144.272,65.278 v1(144.272,44.704) ; Q5.3 143.662,-14.072 143.941,-14.351 152.812,-14.351 153.035,-14.128 153.035,4.318 152.273,5.08 135.923,5.08 D1.2 135.796,8.476 132.461,11.811 132.461,17.018 U1.2 132.588,16.65 135.395,13.843 143.383,13.843 144.399,14.859 v1(144.399,38.862) v1@144.018,39.243 ; U2.8 125.349,89.916 R1.1 130.152,89.639 130.092,89.639 R2.2@128.35,87.898
  Bottom Layer w0.381: v1(121.92,86.868) 121.92,89.281 U2.8 ; v1@133.223,87.757 135.382,85.598 v1(135.382,82.169) ; v1@144.145,44.831 v1(144.272,44.704) 144.399,44.577 v1(144.399,38.862)
pads on no net: CR1.2 Q1.3 Q1.6 U1.3 U1.6 U1.7 U1.8

## Polygon pours and split planes (outlines as drawn)
NetCR1_1 on Top Layer "Top Layer-NetCR1_1" (solid, pour order 8): 0.508,35.56 16.764,35.56 16.764,43.18 5.334,43.18 5.334,63.246 19.812,63.246 19.812,77.089 0.508,77.089 0.508,63.246
NET_- on Top Layer "NET_-_L01_P006" (solid, pour order 6): 84.201,38.735 88.773,38.735 88.773,16.129 88.519,15.875 76.962,15.875 76.962,26.289 84.201,33.528
NET_+ on Top Layer "NET_+_L01_P005" (solid, pour order 5): 80.01,43.053 80.01,36.957 82.169,36.957 82.169,40.005 88.138,40.005 88.138,43.053
GND on Top Layer "GND_L01_P003" (solid, pour order 3): 61.341,97.663 61.341,70.231 73.025,70.231 73.025,97.663
NetR10_2 on Top Layer "NETR10_2_L01_P002" (solid, pour order 2): 32.131,83.566 32.131,68.072 44.323,68.072 44.323,83.566
NetJ2_01 on Top Layer "NETJ2_01_L01_P000" (solid, pour order 0): 0.889,96.266 0.889,85.217 17.145,85.217 17.145,96.266

## Silkscreen, mask and mechanical layers (free items; w line width, h text height)
Top Overlay:
  drawing of 13 lines, arcs and shapes, not listed

## Text inside footprints (layer, text, board x,y; h text height)
U1: Top Overlay "*" at 129.515,16.573 h1.27 r90; Mechanical 13 "*" at 128.854,18.288 h1.27 r90
U3: Top Overlay "*" at 96.507,37.668 h1.27 r180; Mechanical 13 "*" at 96.507,37.668 h1.27 r180